# Altium PCB MCU.PcbDoc (part 1 of 2)
Units mil, origin at the board's own origin, x right, y up, seen from the top; angles counter-clockwise.
Board outline 3149.61 x 1968.5 mil, 4 copper layers (L1(Signal), L2(PWR), L3(GND), L4(Signal)), stack 59.53 mil thick; 84 components, 75 nets, 297 pads, 175 vias.
Unrouted connection lines stored in the file: 10.
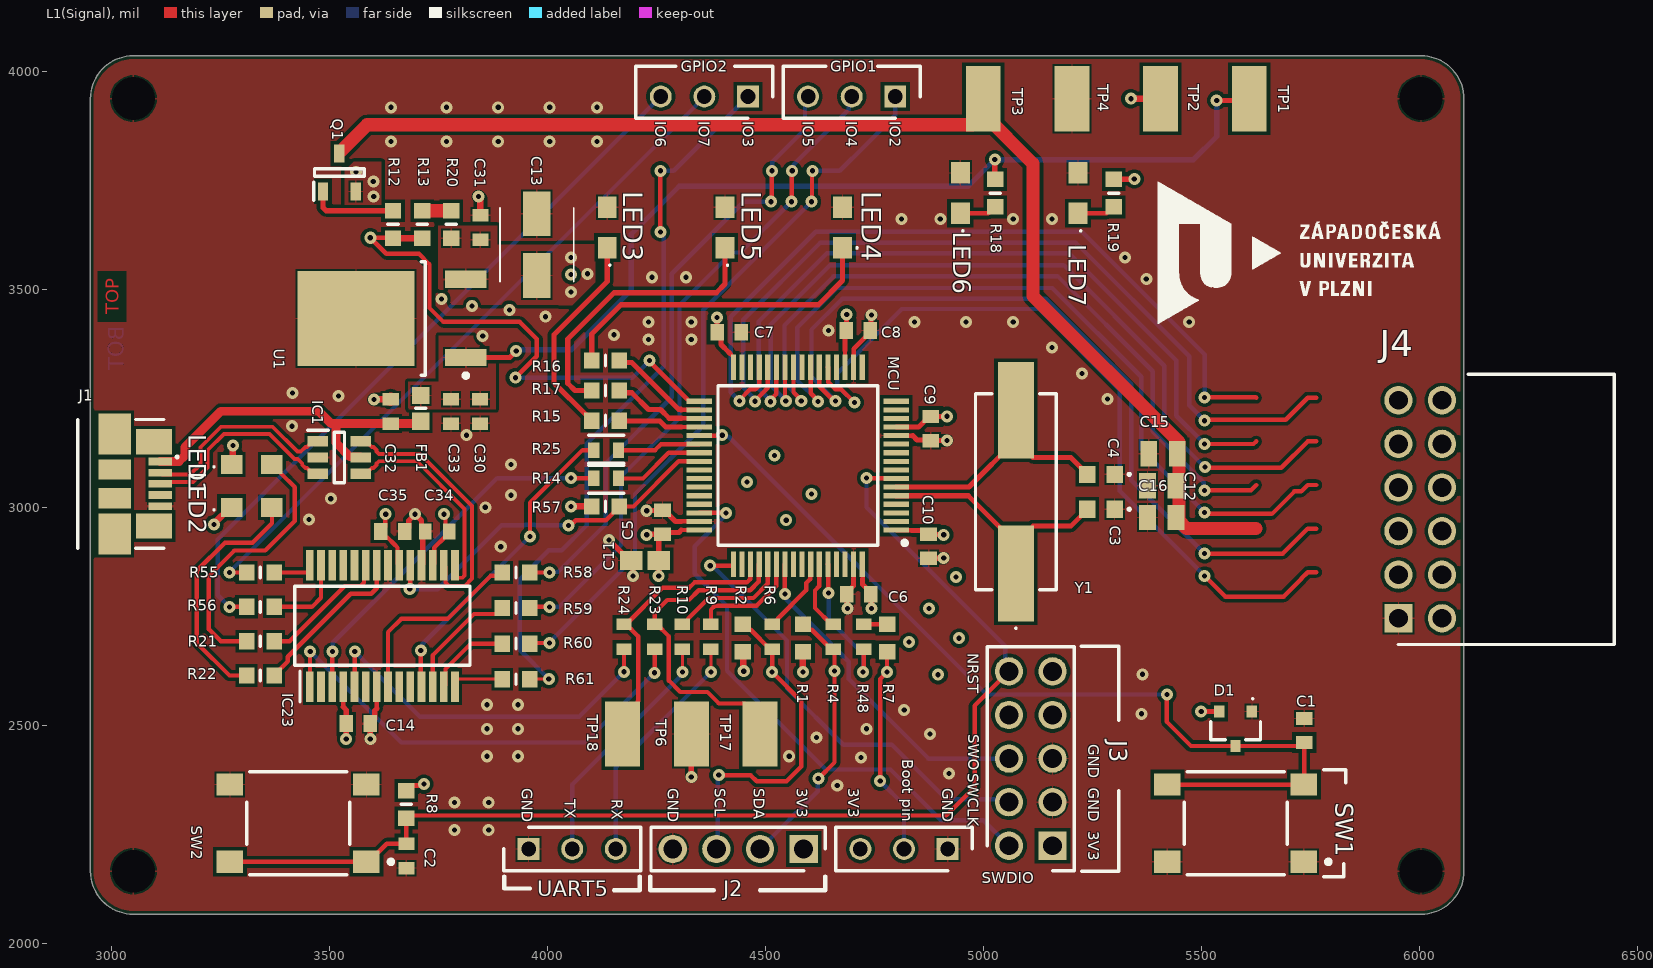
[diagram p0: L1(Signal) view]
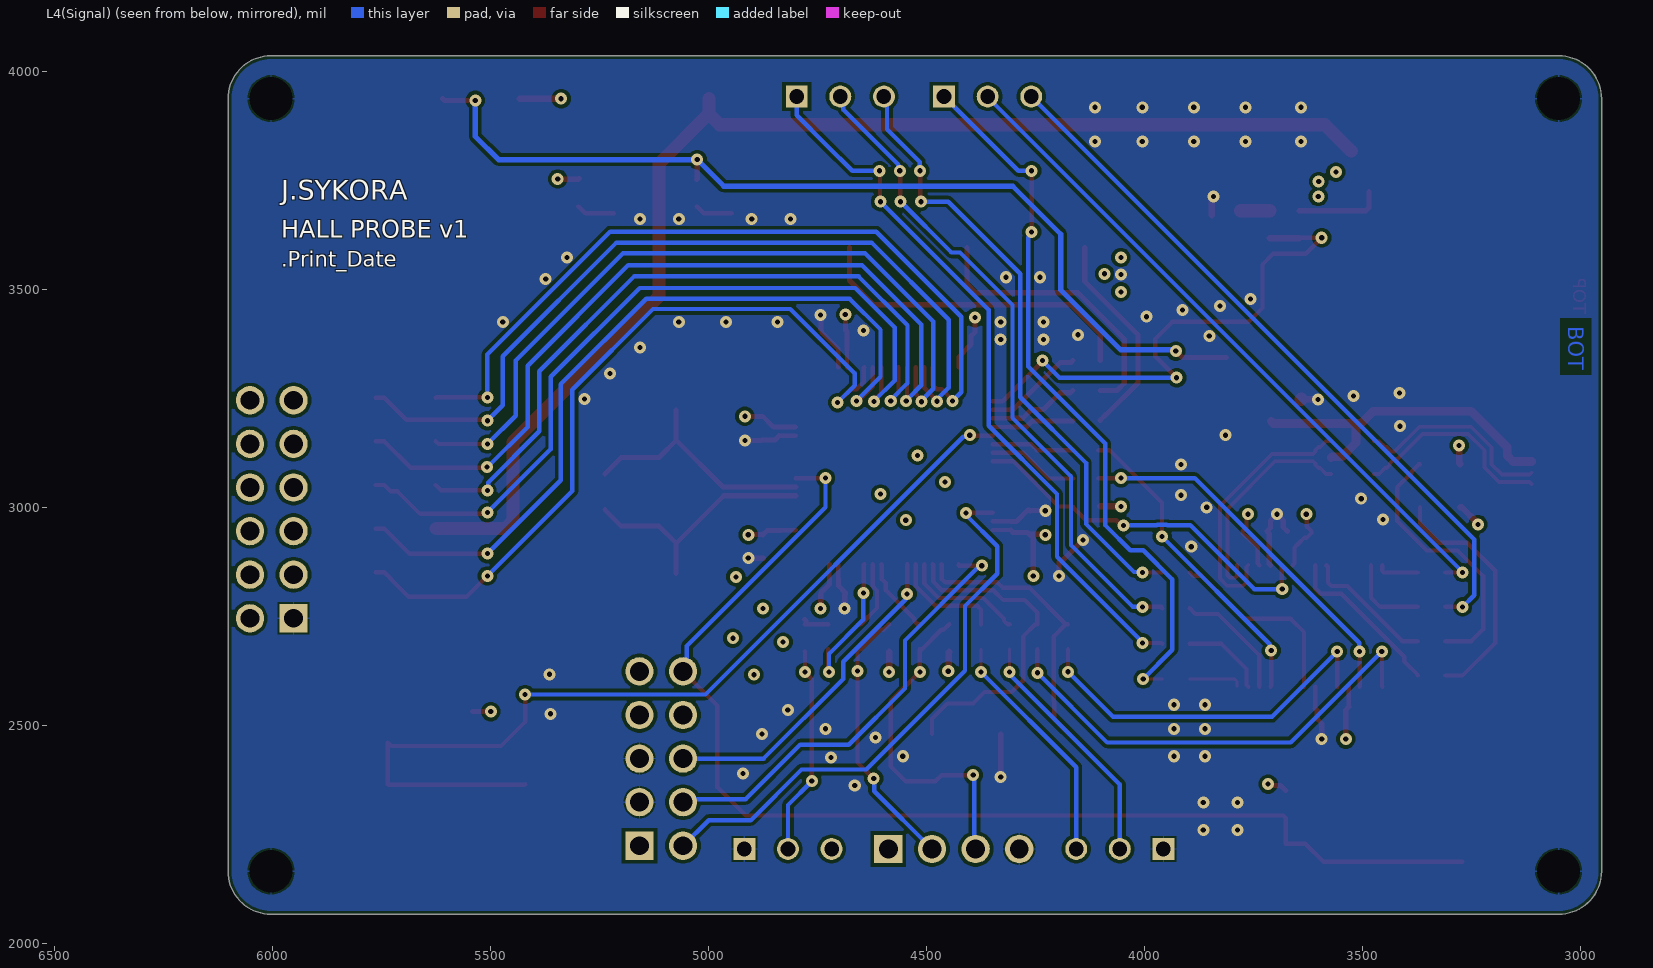
[diagram p1: L4(Signal) view, seen from below]
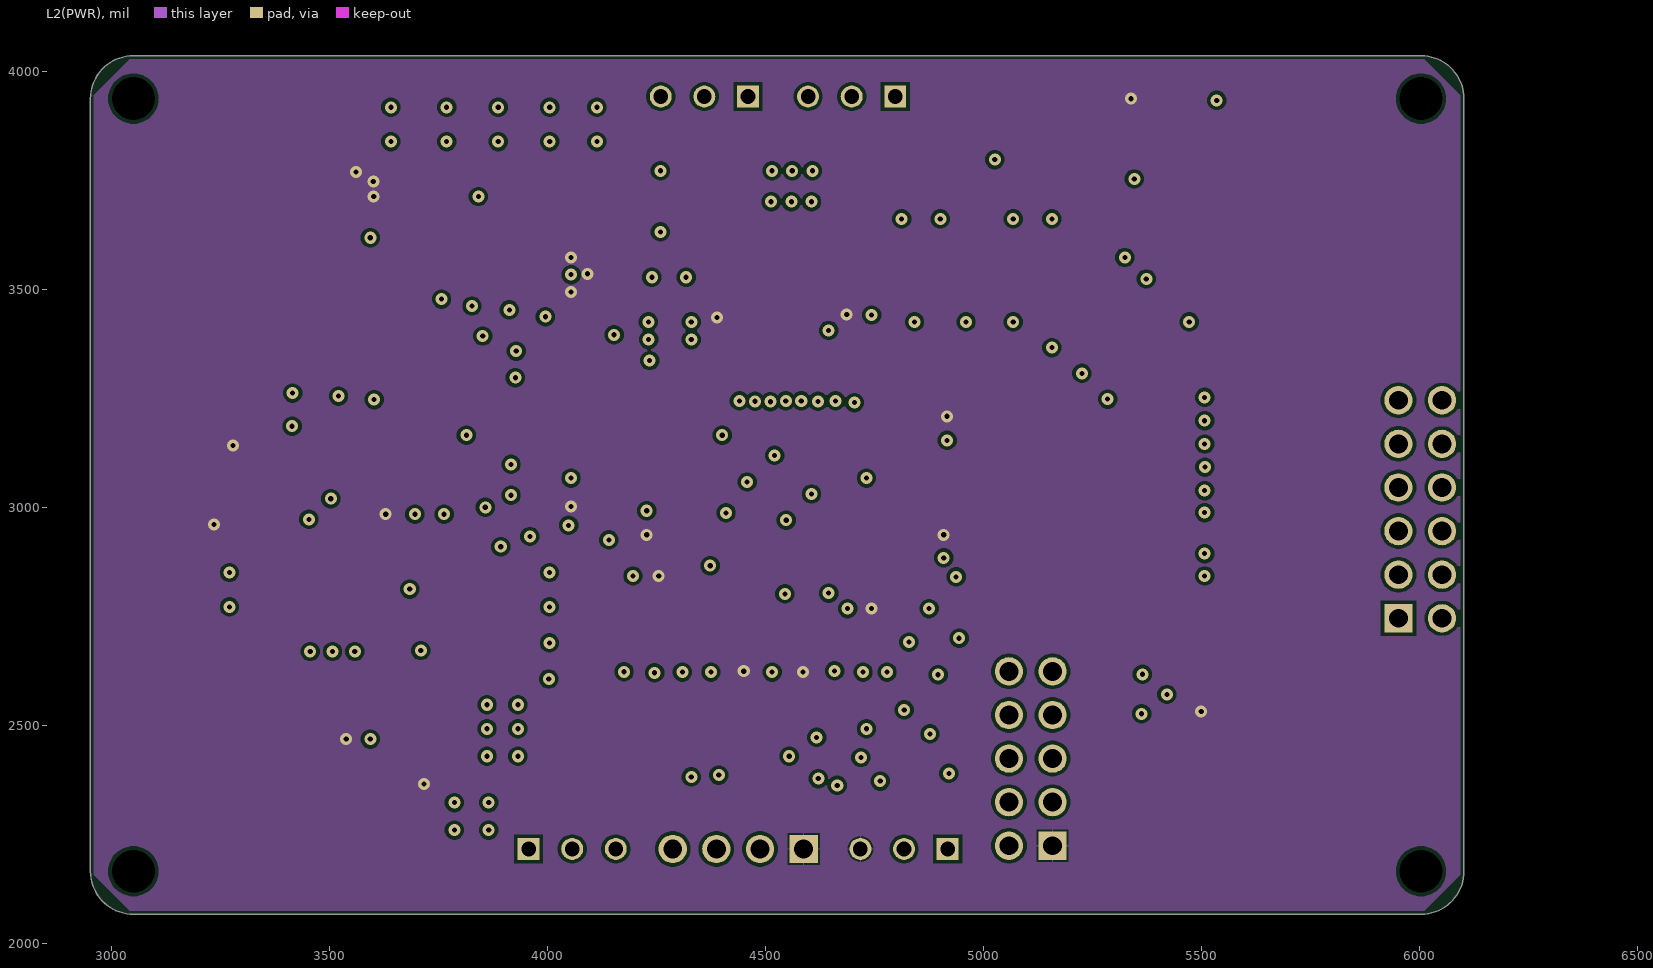
[diagram p2: L2(PWR)]
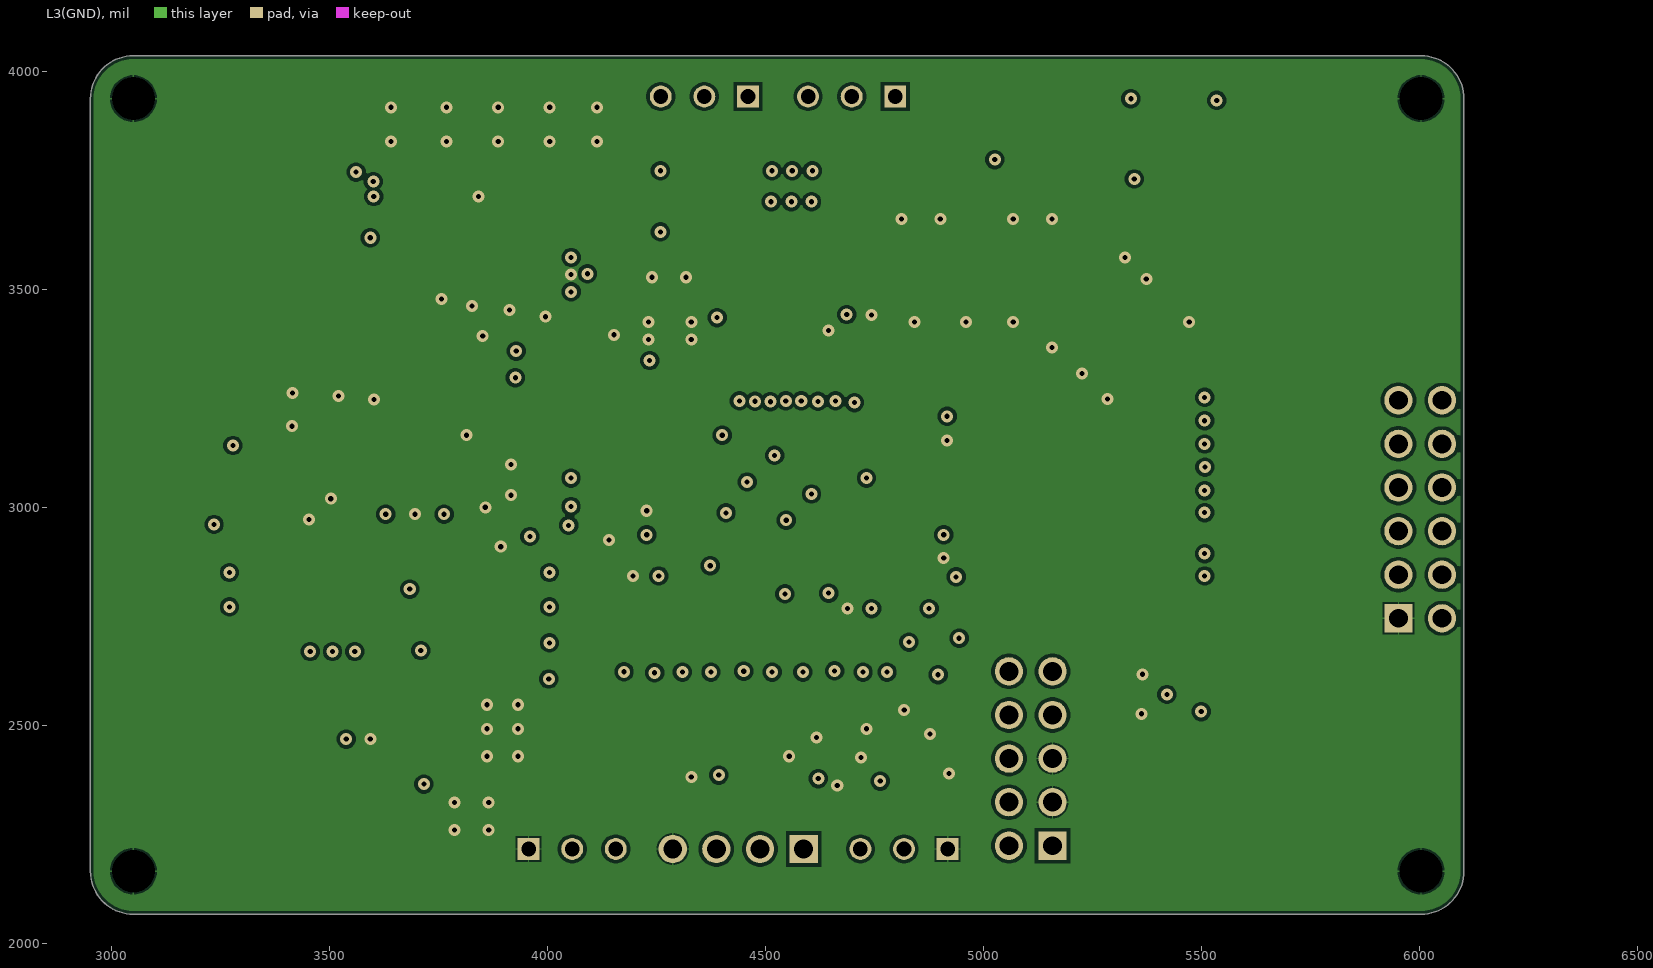
[diagram p3: L3(GND)]
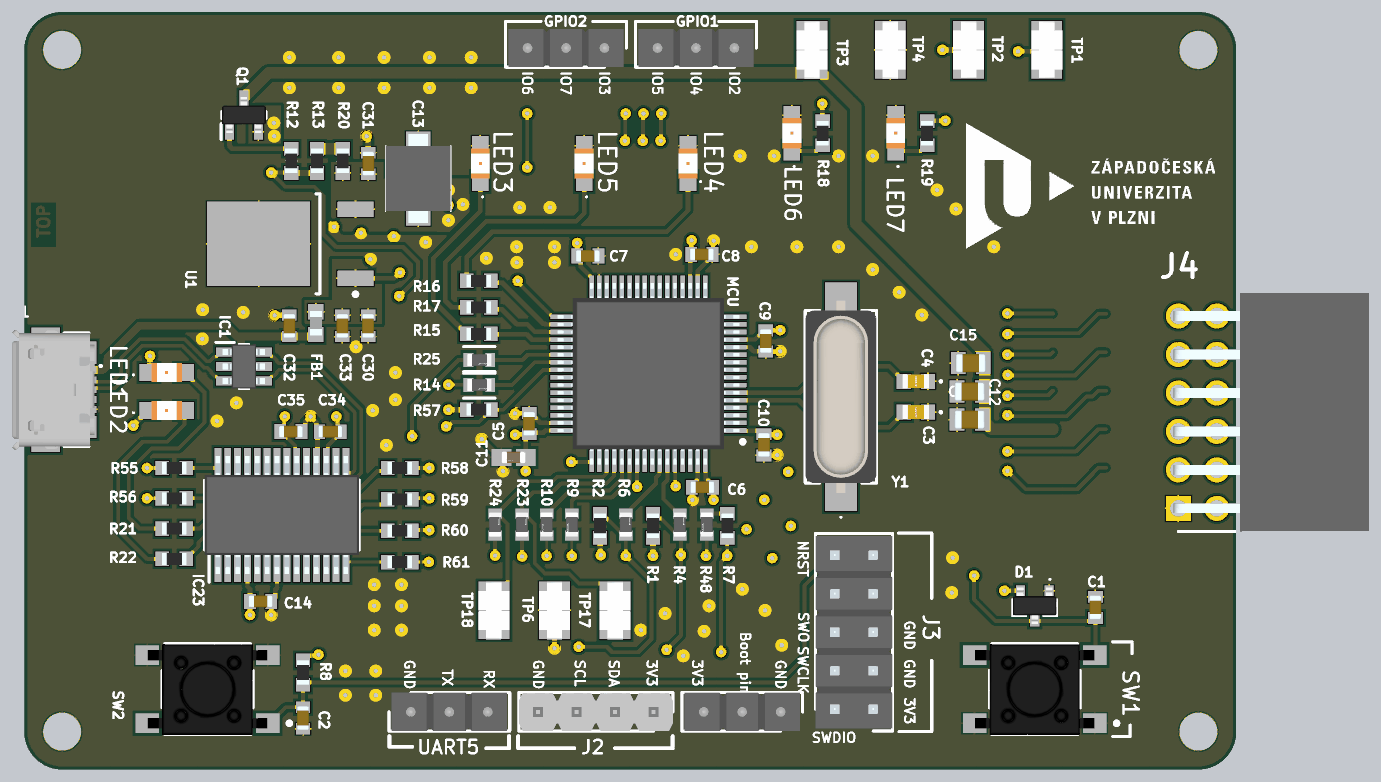
[diagram p4: 3D render of the assembled board from above, using the file's embedded part models]

## Layer stack, top to bottom
Top Solder: solder mask 0.984, Solder Resist, Dk 3.7
L1(Signal): signal copper 0.709
Dielectric 1: prepreg 2.717, 2313, Dk 4.3
Dielectric 3: prepreg 2.717, PP-006, Dk 4.3
L2(PWR): signal copper 1.378
Core: core 44.488, FR-4, Dk 4.6
L3(GND): signal copper 1.378
Dielectric 2: prepreg 2.717, 2313, Dk 4.3
Dielectric 4: prepreg 2.717, PP-006, Dk 4.3
L4(Signal): signal copper 0.709
Bottom Solder: solder mask 0.984, Solder Resist, Dk 3.7

## Board outline
2952.76,2165.35 2952.76,3937.01 cw(c3051.18,3937.01) 3051.18,4035.43 6003.94,4035.43 cw(c6003.94,3937.01) 6102.36,3937.01 6102.36,2165.35 cw(c6003.94,2165.35) 6003.94,2066.93 3051.18,2066.93 cw(c3051.18,2165.35)

## Design rules (kind name [scope] priority, off if disabled: settings)
BoardOutlineClearance [All] p1: gap=7.87 ignorepadtopadclearanceinfootprint=FALSE
Clearance [All] p1: gap=7.87 ignorepadtopadclearanceinfootprint=FALSE
ComponentClearance [All] p1: gap=4 collisioncheckmode=3 verticalgap=4 showdistances=TRUE
DiffPairsRouting [All] p1: maxlimit=8 minlimit=4 mostfreqgap=5 toplayer_mingap=8 toplayer_prefgap=8 toplayer_minwidth=8.96 toplayer_maxwidth=8.96 toplayer_prefwidth=8.96 bottomlayer_mingap=5 bottomlayer_maxgap=5 bottomlayer_minwidth=7.3 bottomlayer_maxwidth=7.3 bottomlayer_prefwidth=7.3 impedanceprofiledriven=TRUE impedanceprofileid={8D1EFE06-021B-4C95-90AD-C5009AD51BC2} impedanceprofilevalue=90.000000 maxuncoupledlength=500
Height [All] p1: minheight=0 maxheight=71497.94 prefheight=500
HoleSize [All] p1: absolutevalues=TRUE maxlimit=248.03 minlimit=7.87 maxpercent=80.000 minpercent=20.000
HoleToHoleClearance [All] p1: gap=9.84 allowstackedmicrovias=FALSE
MinimumAnnularRing [All] p1: minimumring=3
MinimumSolderMaskSliver [All] p1: minsoldermaskwidth=0
PlaneClearance [All] p1: clearance=4
PlaneConnect PlaneConnectPowerPads [InPadClass('PowerPads')] p1: planeconnectstyle=Direct reliefexpansion=20 reliefentries=4 reliefconductorwidth=10 reliefairgap=10
PlaneConnect [All] p2: pad.planeconnectstyle=Relief pad.reliefexpansion=11.81 pad.reliefentries=4 pad.reliefconductorwidth=4 pad.reliefairgap=4 via.planeconnectstyle=Direct via.reliefexpansion=11.81 via.reliefentries=4 via.reliefconductorwidth=5 via.reliefairgap=5
PolygonConnect PolygonConnectPowerPads [All vs (InPadClass('PowerPads'))] p1: connectstyle=Direct reliefconductorwidth=10 reliefentries=4 polygonreliefangle="90 Angle" airgapwidth=10
PolygonConnect [All] p2: thpad.connectstyle=Relief thpad.reliefconductorwidth=4 thpad.reliefentries=4 thpad.polygonreliefangle="90 Angle" thpad.airgapwidth=4 smdpad.connectstyle=Relief smdpad.reliefconductorwidth=4 smdpad.reliefentries=4 smdpad.polygonreliefangle="90 Angle" smdpad.airgapwidth=4 via.connectstyle=Direct via.reliefconductorwidth=5 via.reliefentries=4 via.polygonreliefangle="90 Angle" via.airgapwidth=5
RoutingVias [All] p1: holewidth=11.81 width=27.56 viastyle="Through Hole" minholewidth=7.87 minwidth=17.72 maxholewidth=248.03 maxwidth=257.87
SilkToSilkClearance [All] p1: silktosilkclearance=0
SilkToSolderMaskClearance [IsPad] p1: minsilkscreentomaskgap=4 clearancetoexposedcopper=TRUE
SolderMaskExpansion [All] p1: expansion=2.95 istentingtop=FALSE
Width [All] p1: maxlimit=71497.94 minlimit=4 preferedwidth=10
20 further rules are at their usual default settings.

## Classes and differential pairs
differential pair class DIFF_USB: CONN_USB_D
component class MCU: "Boot pin" C1 C2 C3 C4 C5 C6 C7 C8 C9 C10 C11 C12 C13 C14 C15 C16 C30 C31 C32 C33 C34 C35 D1 FB1 GPIO1 GPIO2 IC1 IC23 J1 J2 J3 LED1 LED2 MCU Q1 R1 R2 R4 R6 R7 R8 R9 R10 R12 R13 R14 R20 R21 R22 R23 R24 R25 R48 R55 R56 R57 R58 R59 R60 R61 SW1 SW2 TP1 TP2 TP3 TP4 TP6 TP17 TP18 U1 UART5 Y1
component class U_LED_STATUS: 3.3v LED3 LED4 LED5 LED6 LED7 R15 R16 R17 R18 R19
differential pair CONN_USB_D: +CONN_USB_D_P -CONN_USB_D_N
differential pair USB_D: +USB_D_P -USB_D_N

## Components (designator, comment, footprint, x,y, rotation, side; value= is the part's Value field where it differs from the comment)
"Boot pin" "M20-9990345" HDRV3W64P0X254_1X3_762X254X864P 4918.5,2216.54 r180 top
C1 "100n" CAPC1608X95N 5736.22,2488.19 r270 top
C2 "100n" CAPC1608X90N 3677.17,2200.79 r90 top
C3 "18pF" C0603 5269.9,2995.57 r180 top
C4 "18pF" C0603 5269.9,3075.57 r180 top
C5 "100n" CAPC1608X95N 4264.9,2965.57 r270 top
C6 "100n" CAPC1608X95N 4714.9,2800.57 r0 top
C7 "100n" CAPC1608X95N 4417.32,3401.57 r180 top
C8 "100n" CAPC1608X95N 4713.52,3405.57 r180 top
C9 "100n" CAPC1608X95N 4879.9,3180.57 r90 top
C10 "100n" CAPC1608X95N 4874.9,2910.57 r90 top
C11 "10u" FP-GRM188-0_2-IPC_A 4224.41,2877.95 r180 top
C12 "47uF 10VDC 0805" CAPC2012X145N 5409.45,3049.21 r0 top
C13 "865080640004" 865080640004 3976.38,3602.36 r270 top
C14 "4.7uF" CAPC1608X95N 3566.93,2503.94 r180 top
C15 "47uF 10VDC 0805" CAPC2012X145N 5412.4,3123.03 r0 top
C16 "47uF 10VDC 0805" CAPC2012X145N 5409.45,2976.38 r0 top
C30 "1uF" CAPC1608X90N 3846.46,3219.88 r90 top
C31 "2.2uF" CAPC1608X90N 3846.93,3641.73 r270 top
C32 "2u2" CAPC1608X90N 3641.54,3219.88 r270 top
C33 "2u2" CAPC1608X90N 3779.33,3219.88 r90 top
C34 "1uF" CAPC1608X90N 3748.03,2944.88 r180 top
C35 "100n" CAPC1608X95N 3645.67,2944.88 r180 top
D1 "BAV99,215" BAV99215 5578.74,2492.13 r180 top
FB1 "FERRITE BEAD" BEADC1608X75N 3710.43,3226.77 r270 top
GPIO1 "GPIO_2_4_5 CONNECTOR" HDRV3W64P0X254_1X3_762X254X864P 4798.43,3941.93 r180 top
GPIO2 "GPIO 3_6_7 CONNECTOR" HDRV3W64P0X254_1X3_762X254X864P 4460.63,3941.93 r180 top
IC1 "ESD PROTECTION" SOT95P280X145-6N 3523.62,3114.17 r0 top
IC23 "UART to USB" SOP65P780X200-28N 3622.34,2728.08 r90 top
J1 "USB CONNECTOR" 47346-0001 2923.75,3053.71 r90 top
J2 "I2C PIN HEADER" HDRV4W90P0X254_1X4_994X249X560P 4588.19,2216.54 r180 top
J3 "SWD" HDRV10W64P254_2X5_1270X508X834P 5159.06,2223.82 r90 top
J4 "SSQ-106-02-T-D-RA" RHDRRA12W64P254_2X6_1575X851X495P 5952.17,2745.47 r270 top
LED1 "RED_RX" APT2012SECKJ3PRV 3322.83,3098.43 r0 top
LED2 "RED_TX" APT2012SECKJ3PRV 3322.83,3000 r0 top
LED3 "RED" APT2012SECKJ3PRV 4137.8,3641.73 r90 top
LED4 "RED" APT2012SECKJ3PRV 4677.66,3641.73 r90 top
LED5 "RED" APT2012SECKJ3PRV 4407.73,3641.73 r90 top
LED6 "RED" APT2012SECKJ3PRV 4947.59,3720.47 r90 top
LED7 "RED" APT2012SECKJ3PRV 5217.52,3720.47 r90 top
MCU "STM32F103RET6" QFP50P1200X1200X160-64N 4574.9,3095.57 r180 top
Q1 "PMV48XPA2R" SOT95P230X110-3N 3523.62,3767.72 r90 top
R1 "2k2" RESC1608X55N 4586.61,2700.25 r90 top
R2 "2k2" RESC1608X55N 4448.82,2700.25 r90 top
R4 "0R" FP-ERJ-3GEY0R00V-MFG 4656.32,2703.2 r270 top value=0Ω
R6 "0R" FP-ERJ-3GEY0R00V-MFG 4516.02,2703.2 r270 top value=0Ω
R7 "10k" RESC1608X55N 4779.89,2700.25 r270 top
R8 "10k" RESC1608X55N 3677.17,2318.9 r90 top
R9 "0R" FP-ERJ-3GEY0R00V-MFG 4375.72,2703.2 r90 top value=0Ω
R10 "0R" FP-ERJ-3GEY0R00V-MFG 4310.29,2703.2 r90 top value=0Ω
R12 "0R" RESC1608X55N 3646.65,3648.62 r90 top
R13 "0R" RESC1608X55N 3713.48,3648.62 r90 top
R14 "0R" FP-ERJ-3GEY0R00V-MFG 4135.37,3066.2 r180 top value=0Ω
R15 "1k2" RESC1608X55N 4133.86,3198.82 r0 top
R16 "1k2" RESC1608X55N 4133.86,3336.61 r0 top
R17 "1k2" RESC1608X55N 4133.86,3267.72 r0 top
R18 "1k2" RESC1608X55N 5027.56,3720.47 r90 top
R19 "1k2" RESC1608X55N 5299.21,3720.47 r90 top
R20 "10k" RESC1608X55N 3780.3,3648.62 r270 top
R21 "1k2" RESC1608X55N 3342.52,2692.91 r0 top
R22 "1k2" RESC1608X55N 3342.52,2614.17 r0 top
R23 "0R" FP-ERJ-3GEY0R00V-MFG 4246.51,2703.2 r270 top value=0Ω
R24 "0R" FP-ERJ-3GEY0R00V-MFG 4176.36,2703.2 r270 top value=0Ω
R25 "0R" FP-ERJ-3GEY0R00V-MFG 4135.37,3131.2 r180 top value=0Ω
R48 "0R" FP-ERJ-3GEY0R00V-MFG 4726.48,2703.2 r90 top value=0Ω
R55 "0R" RESC1608X55N 3342.52,2850.39 r0 top
R56 "0R" RESC1608X55N 3342.52,2771.65 r0 top
R57 "10K" RESC1608X55N 4133.86,3001.97 r180 top
R58 "0R" RESC1608X55N 3928.61,2850.39 r180 top
R59 "0R" RESC1608X55N 3928.61,2768.92 r180 top
R60 "0R" RESC1608X55N 3928.61,2687.44 r180 top
R61 "0R" RESC1608X55N 3928.61,2605.97 r180 top
SW1 "BUTTON" FP-PTS645SM43SMTR92LFS-MFG 5578.74,2275.59 r180 top
SW2 "#RESET" FP-PTS645SM43SMTR92LFS-MFG 3429.13,2275.59 r180 top
TP1 "5019" KSTN-5019_V 5610.24,3937.01 r270 top
TP2 "5019" KSTN-5019_V 5406.82,3937.01 r270 top
TP3 "5019" KSTN-5019_V 5000,3937.01 r90 top
TP4 "5019" KSTN-5019_V 5203.41,3937.01 r90 top
TP6 "5019" KSTN-5019_V 4330.71,2480.32 r90 top
TP17 "5019" KSTN-5019_V 4488.19,2480.32 r90 top
TP18 "5019" KSTN-5019_V 4173.23,2480.31 r90 top
U1 "LD39150DT33-R" TO-252_M 3644.25,3433.15 r180 top
UART5 "UART5 CONNECTOR" HDRV3W64P0X254_1X3_762X254X864P 3957.48,2216.54 r0 top
Y1 "16MHz" ABLS 5074.9,3035.57 r90 top

## Footprints (in the part's own frame and the unit in brackets; to place one, negate y for a bottom-side part, rotate by r counter-clockwise, add the part's x,y. Pads: shape width x height; smd on the part's side, far side on the other; paste and mask are expansions set on the pad)
47346-0001 [mm]
  rect 0.45x1.38 smd: 1(1.3,-4.81) 2(0.65,-4.81) 3(0,-4.81) 4(-0.65,-4.81) 5(-1.3,-4.81)
  rect 1.475x2.1 smd: 6(-2.452,-4.45) 7(2.452,-4.45)
  rect 1.175x1.9 smd: 8(0.837,-2.15) 9(-0.837,-2.15)
  rect 2.375x1.9 smd: 10(2.913,-2.15) 11(-2.913,-2.15)
  silkscreen extent -3.75,-5.84 3.75,0, body extent -3.99,-5.38 3.99,0.05, height 2.7
865080640004 [mm]
  rect 2.6x1.6 smd: 1(1.8,0) 2(-1.8,0)
  silkscreen extent -2.15,-2.15 2.15,2.15, body extent -2.94,-2.15 2.94,2.15, height 5.6
ABLS [mm]
  rect 5.6x2.1 smd: 1(-4.75,0) 2(4.75,0)
  silkscreen extent -8,-2.35 5.7,2.35, body extent -6.35,-2.35 6.35,2.35, height 4.2
APT2012SECKJ3PRV [mm]
  rect 1.25x1.1 smd: 1(-1.175,0) 2(1.175,0)
  silkscreen extent -2.25,-0.2 -2.15,-0.1, body extent -1,-0.63 1,0.63, height 0.85
BAV99215 [mm]
  rect 0.6x0.7 smd: 1(-0.95,-1) 2(0.95,-1) 3(0,1)
  silkscreen extent -1.45,-1.8 1.45,0.65, body extent -1.45,-1.2 1.45,1.2, height 0.95
BEADC1608X75N [mm]
  rect 1x1 smd: 1(-0.75,0) 2(0.75,0)
  silkscreen extent 0,-0.3 0,0.3, body extent -0.8,-0.4 0.8,0.4, height 0.75
C0603 [mm]
  rect 0.95x1 smd: 1(-0.8,0) 2(0.8,0)
  silkscreen extent -1.7,-0.05 -1.6,0.05, body extent -0.87,-0.48 0.88,0.47, height 0.87
CAPC1608X90N [mm]
  rect 0.73x0.94 smd: 1(-0.71,0) 2(0.71,0)
  body extent -0.8,-0.4 0.8,0.4, height 0.9
CAPC1608X95N [mm]
  rect 0.78x0.98 smd: 1(-0.7,0) 2(0.7,0)
  body extent -0.8,-0.4 0.8,0.4, height 0.95
CAPC2012X145N [mm]
  rect 0.97x1.47 smd: 1(-0.83,0) 2(0.83,0)
  body extent -1,-0.63 1,0.63, height 1.45
FP-ERJ-3GEY0R00V-MFG [mm]
  rect 0.65x0.9 smd paste+0 mask+0: 1(-0.725,0) 2(0.725,0)
  body extent -1.15,-0.58 1.15,0.58, height 0.25
FP-GRM188-0_2-IPC_A [mil]
  rect 51.38x43.55 smd paste+0 mask+0: 1(-31.52,0) 2(31.52,0)
  body extent -77,-41 77,41, height 10
FP-PTS645SM43SMTR92LFS-MFG [mm]
  rect 1.55x1.3 smd paste+0 mask+0: 1(-3.975,2.25) 2(3.975,2.25) 3(-3.975,-2.25) 4(3.975,-2.25)
  silkscreen extent -5.53,-3 3,3, body extent -4.85,-3.1 4.85,3.1, height 0.25
HDRV3W64P0X254_1X3_762X254X864P [mm]
  rect 1.275x1.275 hole 0.85: 1(0,0)
  round 1.275 hole 0.85: 2(2.54,0) 3(5.08,0)
  silkscreen extent -1.45,-1.27 6.53,1.27, body extent -1.27,-1.27 6.35,1.27, height 8.64
HDRV4W90P0X254_1X4_994X249X560P [mm]
  rect 1.65x1.65 hole 1.1: 1(0,0)
  round 1.65 hole 1.1: 2(2.54,0) 3(5.08,0) 4(7.62,0)
  silkscreen extent -1.27,-1.27 8.89,1.27, body extent -1.27,-1.25 8.89,1.25, height 5.3
HDRV10W64P254_2X5_1270X508X834P [mm]
  rect 1.65x1.65 hole 1.1: 1(0,0)
  round 1.65 hole 1.1: 2(0,2.54) 3(2.54,0) 4(2.54,2.54) 5(5.08,0) 6(5.08,2.54) 7(7.62,0) 8(7.62,2.54) 9(10.16,0) 10(10.16,2.54)
  silkscreen extent -1.45,-1.27 11.61,3.81, body extent -1.27,-1.27 11.43,3.81, height 8.34
KSTN-5019_V [mm] "Test Point, 1-Leads, Body 3.81x2.03mm"
  rect 3.8x2.03 smd: 1(0,0)
  body extent -1.91,-1.02 1.9,1.02, height 2.29
QFP50P1200X1200X160-64N [mm]
  rect 1.475x0.3 smd: 1(-5.738,3.75) 2(-5.738,3.25) 3(-5.738,2.75) 4(-5.738,2.25) 5(-5.738,1.75) 6(-5.738,1.25) 7(-5.738,0.75) 8(-5.738,0.25) 9(-5.738,-0.25) 10(-5.738,-0.75) 11(-5.738,-1.25) 12(-5.738,-1.75) 13(-5.738,-2.25) 14(-5.738,-2.75) 15(-5.738,-3.25) 16(-5.738,-3.75) 33(5.738,-3.75) 34(5.738,-3.25) 35(5.738,-2.75) 36(5.738,-2.25) 37(5.738,-1.75) 38(5.738,-1.25) 39(5.738,-0.75) 40(5.738,-0.25) 41(5.738,0.25) 42(5.738,0.75) 43(5.738,1.25) 44(5.738,1.75) 45(5.738,2.25) 46(5.738,2.75) 47(5.738,3.25) 48(5.738,3.75)
  rect 0.3x1.475 smd: 17(-3.75,-5.738) 18(-3.25,-5.738) 19(-2.75,-5.738) 20(-2.25,-5.738) 21(-1.75,-5.738) 22(-1.25,-5.738) 23(-0.75,-5.738) 24(-0.25,-5.738) 25(0.25,-5.738) 26(0.75,-5.738) 27(1.25,-5.738) 28(1.75,-5.738) 29(2.25,-5.738) 30(2.75,-5.738) 31(3.25,-5.738) 32(3.75,-5.738) 49(3.75,5.738) 50(3.25,5.738) 51(2.75,5.738) 52(2.25,5.738) 53(1.75,5.738) 54(1.25,5.738) 55(0.75,5.738) 56(0.25,5.738) 57(-0.25,5.738) 58(-0.75,5.738) 59(-1.25,5.738) 60(-1.75,5.738) 61(-2.25,5.738) 62(-2.75,5.738) 63(-3.25,5.738) 64(-3.75,5.738)
  silkscreen extent -6.35,-4.65 4.65,4.65, body extent -6,-6 6,6, height 1.6
RESC1608X55N [mm]
  rect 0.9x0.95 smd: 1(-0.8,0) 2(0.8,0)
  body extent -0.8,-0.4 0.8,0.4, height 0.55
RHDRRA12W64P254_2X6_1575X851X495P [mm]
  rect 1.65x1.65 hole 1.1: 1(0,0)
  round 1.65 hole 1.1: 2(0,2.54) 3(-2.54,0) 4(-2.54,2.54) 5(-5.08,0) 6(-5.08,2.54) 7(-7.62,0) 8(-7.62,2.54) 9(-10.16,0) 10(-10.16,2.54) 11(-12.7,0) 12(-12.7,2.54)
  silkscreen extent -14.23,0 1.53,12.57, body extent -14.23,-0.32 1.53,12.57, height 4.95
SOP65P780X200-28N [mm]
  rect 1.775x0.45 smd: 1(-3.538,4.225) 2(-3.538,3.575) 3(-3.538,2.925) 4(-3.538,2.275) 5(-3.538,1.625) 6(-3.538,0.975) 7(-3.538,0.325) 8(-3.538,-0.325) 9(-3.538,-0.975) 10(-3.538,-1.625) 11(-3.538,-2.275) 12(-3.538,-2.925) 13(-3.538,-3.575) 14(-3.538,-4.225) 15(3.538,-4.225) 16(3.538,-3.575) 17(3.538,-2.925) 18(3.538,-2.275) 19(3.538,-1.625) 20(3.538,-0.975) 21(3.538,-0.325) 22(3.538,0.325) 23(3.538,0.975) 24(3.538,1.625) 25(3.538,2.275) 26(3.538,2.925) 27(3.538,3.575) 28(3.538,4.225)
  silkscreen extent -4.43,-5.1 2.3,5.1, body extent -3.9,-5.1 3.9,5.1, height 2
SOT95P230X110-3N [mm]
  rect 1.05x0.6 smd: 1(-1.1,0.95) 2(-1.1,-0.95) 3(1.1,0)
  silkscreen extent -1.63,-1.45 0.23,1.5, body extent -1.2,-1.45 1.2,1.45, height 0.95
SOT95P280X145-6N [mm]
  rect 1.2x0.6 smd: 1(-1.25,0.95) 2(-1.25,0) 3(-1.25,-0.95) 4(1.25,-0.95) 5(1.25,0) 6(1.25,0.95)
  silkscreen extent -1.85,-1.46 0.3,1.6, body extent -1.4,-1.46 1.4,1.46, height 1.45
TO-252_M [mm] "D-PAK, 4-Leads, Body 6.1x6.5mm, Pitch 2.28mm, Lead Span 9.7mm, IPC Low Density"
  rect 2.4x1 smd: 1(-4.3,2.28) 3(-4.3,-2.28)
  rect 6.8x5.55 smd: 4(2.1,0)
  silkscreen extent -4.43,-3.3 -1.7,3.45, body extent -1.95,-3.3 4.25,3.3, height 2.4

## Part data
"Boot pin": "Connector", Manufacturer_Name=Harwin, Mouser Part Number=855-M20-9990345, Datasheet Link=https://cdn.harwin.com/pdfs/M20-999.pdf, Height=8.64mm, Manufacturer_Part_Number=M20-9990345, Mouser Price/Stock=https://www.mouser.co.uk/ProductDetail/Harwin/M20-9990345?qs=ulE8k0yEMYbl6ZPCtNdmpA%3D%3D
C1 C5 C6 C7 C8 C9 C10 C14 C35: library part C0603C104J4RAC, "Capacitor", Manufacturer_Name=KEMET, Mouser Part Number=80-C0603C104J4RAC, Arrow Part Number=C0603C104J4RAC, Arrow Price/Stock=https://www.arrow.com/en/products/c0603c104j4rac/kemet-corporation?region=nac, Datasheet Link=https://datasheet.datasheetarchive.com/originals/distributors/SFDatasheet-4/sf-00083930.pdf, Height=0.95mm, Manufacturer_Part_Number=C0603C104J4RAC, Mouser Price/Stock=https://www.mouser.co.uk/ProductDetail/KEMET/C0603C104J4RAC?qs=sykUljcfnH31MXmq5HGjkg%3D%3D
C2 C30 C31 C32 C33 C34: library part CL10A105KA8NFNC, "Capacitor", Manufacturer_Name=SAMSUNG, Mouser Part Number=187-CL10A105KA8NFNC, Arrow Part Number=CL10A105KA8NFNC, Arrow Price/Stock=https://www.arrow.com/en/products/cl10a105ka8nfnc/samsung-electro-mechanics?region=nac, Datasheet Link=https://www.mouser.co.za/datasheet/2/585/MLCC-1837944.pdf, Height=0.9mm, Manufacturer_Part_Number=CL10A105KA8NFNC, Mouser Price/Stock=https://www.mouser.co.uk/ProductDetail/Samsung-Electro-Mechanics/CL10A105KA8NFNC?qs=%252B6g0mu59x7ItvV%2F7DV9Lig%3D%3D
C3 C4: library part C0603C180K4HACTU, "Capacitor", Manufacturer_Name=KEMET, Mouser Part Number=80-C0603C180K4HACTU, Datasheet Link=https://content.kemet.com/datasheets/KEM_C1007_X8R_ULTRA_150C_SMD.pdf, Height=0.87mm, Manufacturer_Part_Number=C0603C180K4HACTU, Mouser Price/Stock=https://www.mouser.com/Search/Refine.aspx?Keyword=80-C0603C180K4HACTU
C11: library part CMP-2006-02814-2, "Chip Multilayer Ceramic Capacitors for General Purpose, 0603, 10uF, X5R, 15%, 20%, 16V", Capacitance=10uF, Case Code (Imperial)=0603, Case Code (Metric)=1608, Dielectric=X5R, Max Operating Temperature=85°C, Min Operating Temperature=-55°C, Package Quantity=4000, Tolerance=20%, Voltage=16V, Case/Package=0603, Depth=0.8mm, Height=0.8mm, Lead Free="Lead Free", Length=1.6mm, Mount="Surface Mount", Packaging="Tape and Reel", REACH SVHC="No SVHC", Thickness=0.031inch, Voltage Rating=16V, Voltage Rating (DC)=16V, Width=0.031inch
C12 C15 C16: library part GRM21BR61A476ME15K, "Capacitor", Manufacturer_Name="Murata Electronics", Mouser Part Number=81-GRM21BR61A476ME5K, Arrow Part Number=GRM21BR61A476ME15K, Arrow Price/Stock=https://www.arrow.com/en/products/grm21br61a476me15k/murata-manufacturing?region=nac, Datasheet Link=http://www.murata.com/~/media/webrenewal/support/library/catalog/products/capacitor/mlcc/c02e.pdf, Height=1.45mm, Manufacturer_Part_Number=GRM21BR61A476ME15K, Mouser Price/Stock=https://www.mouser.co.uk/ProductDetail/Murata-Electronics/GRM21BR61A476ME15K?qs=hNud%2FORuBR153XPtoO6XtA%3D%3D
C13: "Capacitor Polarised", Manufacturer_Name="Wurth Elektronik", Mouser Part Number=710-865080640004, Datasheet Link=https://www.we-online.de/katalog/datasheet/865080640004.pdf, Height=5.5mm, Manufacturer_Part_Number=865080640004, Mouser Price/Stock=https://www.mouser.co.uk/ProductDetail/Wurth-Elektronik/865080640004?qs=0KOYDY2FL2%2FjY4kqBxIvAg%3D%3D
D1: "Diode", Manufacturer_Name=Nexperia, Mouser Part Number=771-BAV99-T/R, Arrow Part Number=BAV99,215, Arrow Price/Stock=https://www.arrow.com/en/products/bav99215/nexperia?region=nac, Datasheet Link=https://assets.nexperia.com/documents/data-sheet/BAV99_SER.pdf, Height=1.1mm, Manufacturer_Part_Number=BAV99,215, Mouser Price/Stock=https://www.mouser.co.uk/ProductDetail/Nexperia/BAV99215?qs=me8TqzrmIYWbN0bCKV3n5w%3D%3D
FB1: library part BLM18KN101EH1D, "Ferrite Bead", Manufacturer_Name="Murata Electronics", Mouser Part Number=81-BLM18KN101EH1D, Datasheet Link=https://www.murata.com/products/productdata/8809912041502/QNFA9160.pdf, Height=0.75mm, Manufacturer_Part_Number=BLM18KN101EH1D, Mouser Price/Stock=https://www.mouser.co.uk/ProductDetail/Murata-Electronics/BLM18KN101EH1D?qs=DRkmTr78QARL0%2F8fY2NzDQ%3D%3D
GPIO1 GPIO2 UART5: library part M20-9990345, "Connector", Manufacturer_Name=Harwin, Mouser Part Number=855-M20-9990345, Datasheet Link=https://cdn.harwin.com/pdfs/M20-999.pdf, Height=8.64mm, Manufacturer_Part_Number=M20-9990345, Mouser Price/Stock=https://www.mouser.co.uk/ProductDetail/Harwin/M20-9990345?qs=ulE8k0yEMYbl6ZPCtNdmpA%3D%3D
IC1: library part USBLC6-2SC6, "Integrated Circuit", Manufacturer_Name=STMicroelectronics, Mouser Part Number=511-USBLC6-2SC6, Arrow Part Number=USBLC6-2SC6, Arrow Price/Stock=https://www.arrow.com/en/products/usblc6-2sc6/stmicroelectronics?region=nac, Datasheet Link=http://www.st.com/st-web-ui/static/active/en/resource/technical/document/datasheet/CD00050750.pdf, Height=1.45mm, Manufacturer_Part_Number=USBLC6-2SC6, Mouser Price/Stock=https://www.mouser.co.uk/ProductDetail/STMicroelectronics/USBLC6-2SC6?qs=po45yt2pPpu%2FhNIlwQdTlg%3D%3D
IC23: library part CY7C65213-28PVXIT, "Integrated Circuit", Manufacturer_Name=Infineon, Mouser Part Number=727-CY7C6521328PVXIT, Arrow Part Number=CY7C65213-28PVXIT, Arrow Price/Stock=https://www.arrow.com/en/products/cy7c65213-28pvxit/infineon-technologies-ag?region=nac, Datasheet Link=https://componentsearchengine.com/Datasheets/2/CY7C65213-28PVXIT.pdf, Height=2mm, Manufacturer_Part_Number=CY7C65213-28PVXIT, Mouser Price/Stock=https://www.mouser.co.uk/ProductDetail/Infineon-Technologies/CY7C65213-28PVXIT?qs=cwEsOGdHuFTfRgwUJVDa5g%3D%3D
J1: library part 47346-0001, "Connector", Manufacturer_Name=Molex, Mouser Part Number=538-47346-0001, Datasheet Link=http://www.molex.com/pdm_docs/sd/473460001_sd.pdf, Manufacturer_Part_Number=47346-0001, Mouser Price/Stock=https://www.mouser.co.uk/ProductDetail/Molex/47346-0001?qs=c2CV6XM0DweJBWaSeyWeCw%3D%3D
J2: library part 90120-0764, "Connector", Manufacturer_Name=Molex, Mouser Part Number=538-90120-0764, Datasheet Link=https://www.molex.com/webdocs/datasheets/pdf/en-us/0901200764_PCB_HEADERS.pdf, Height=5.6mm, Manufacturer_Part_Number=90120-0764, Mouser Price/Stock=https://www.mouser.co.uk/ProductDetail/Molex/90120-0764?qs=QSnLD11VNirsMTdnHEPG3Q%3D%3D
J3: library part M20-9760542, "Connector", Manufacturer_Name=Harwin, Mouser Part Number=855-M20-9760542, Datasheet Link=https://cdn.harwin.com/pdfs/M20-976.pdf, Height=8.34mm, Manufacturer_Part_Number=M20-9760542, Mouser Price/Stock=https://www.mouser.co.uk/ProductDetail/Harwin/M20-9760542?qs=WS5Jv%252B%252Bx1qWXnFWOyfr5DQ%3D%3D
J4: "Connector", Manufacturer_Name=SAMTEC, Mouser Part Number=200-SSQ10602TDRA, Arrow Part Number=SSQ-106-02-T-D-RA, Arrow Price/Stock=https://www.arrow.com/en/products/ssq-106-02-t-d-ra/samtec?region=nac, Datasheet Link=http://suddendocs.samtec.com/catalog_english/ssq_th.pdf, Height=4.95mm, Manufacturer_Part_Number=SSQ-106-02-T-D-RA, Mouser Price/Stock=https://www.mouser.co.uk/ProductDetail/Samtec/SSQ-106-02-T-D-RA?qs=rU5fayqh%252BE1vYyxgAhwVTA%3D%3D
LED1 LED2 LED3 LED4 LED5 LED6 LED7: library part APT2012SECK_J3-PRV, "LED", Arrow Part Number=APT2012SECK/J3-PRV, Manufacturer_Name=Kingbright, Mouser Part Number=604-APT2012SECKJ3PRV, Arrow Price/Stock=https://www.arrow.com/en/products/apt2012seckj3-prv/kingbright?region=nac, Datasheet Link=https://www.mouser.de/datasheet/2/216/APT2012SECK-J3-PRV-1173389.pdf, Height=0.85mm, Manufacturer_Part_Number=APT2012SECK/J3-PRV, Mouser Price/Stock=https://www.mouser.co.uk/ProductDetail/Kingbright/APT2012SECK-J3-PRV?qs=D2TOvUWgdJ6T9J6WfI%252BQOg%3D%3D
MCU: "Integrated Circuit", Manufacturer_Name=STMicroelectronics, Mouser Part Number=511-STM32F103RET6, Arrow Part Number=STM32F103RET6, Arrow Price/Stock=https://www.arrow.com/en/products/stm32f103ret6/stmicroelectronics?region=nac, Datasheet Link=http://www.st.com/st-web-ui/static/active/en/resource/technical/document/datasheet/CD00191185.pdf, Height=1.6mm, Manufacturer_Part_Number=STM32F103RET6, Mouser Price/Stock=https://www.mouser.co.uk/ProductDetail/STMicroelectronics/STM32F103RET6?qs=tZXS5FmuAdnGL83bu1Xcew%3D%3D
Q1: "MOSFET (P-Channel)", Manufacturer_Name=Nexperia, Mouser Part Number=771-PMV48XPA2R, Arrow Part Number=PMV48XPA2R, Arrow Price/Stock=https://www.arrow.com/en/products/pmv48xpa2r/nexperia?region=nac, Datasheet Link=https://ms.componentsearchengine.com/Datasheets/2/PMV48XPA2R.pdf, Height=1.1mm, Manufacturer_Part_Number=PMV48XPA2R, Mouser Price/Stock=https://www.mouser.co.uk/ProductDetail/Nexperia/PMV48XPA2R?qs=GBLSl2Akirs2B9%2Ft67cLcA%3D%3D
R1 R2 R7 R8 R12 R13 R15 R16 R17 R18 R19 R20 R21 R22 R55 R56 R57 R58 R59 R60 R61: library part RK73B1JTTD103J, "Resistor", Manufacturer_Name="KOA Speer", Mouser Part Number=660-RK73B1JTTD103J, Arrow Part Number=RK73B1JTTD103J, Arrow Price/Stock=https://www.arrow.com/en/products/rk73b1jttd103j/koa-speer-electronics?region=asia, Datasheet Link=http://www.koaspeer.com/catimages/Products/RK73-RT/RK73-RT.pdf, Height=0.55mm, Manufacturer_Part_Number=RK73B1JTTD103J, Mouser Price/Stock=https://www.mouser.co.uk/ProductDetail/KOA-Speer/RK73B1JTTD103J?qs=hmtrJ2UjXcBKRTcwO9LloQ%3D%3D
R4 R6 R9 R10 R14 R23 R24 R25 R48: library part CMP-2000-00700-2, "RES SMD 0 OHM JUMPER 1/10W 0603", Manufacturer=Panasonic, Manufacturer Part Number=ERJ-3GEY0R00V, Package=0603, Power Rating=0.1W, Resistance=0Ω, Temperature="-55°C to +155°C", Temperature Coefficient=-100/+600ppm/°C, Temperature Range High=+155°C, Temperature Range Low=-55°C, Tolerance=5%, Voltage Rating=75V, Automotive=Yes, Automotive Grade="Grade 0", Category=Res, ComponentLink2Description=Datasheet, ComponentLink2URL=https://industrial.panasonic.com/cdbs/www-data/pdf/RDA0000/AOA0000C301.pdf, Composition="Thick Film", Device Class L1="Passive Components", Device Class L2=Resistors, Device Class L3="Chip SMD Resistors", Digikey Description="RES SMD 0 OHM JUMPER 1/10W 0603", Footprint Url=https://industrial.panasonic.com/cdbs/www-data/pdf/RDA0000/DMA0000COL17.pdf, Height=0.55mm, Ipc Land Pattern Name=RESC16080X45, Lead Free=Yes, Mouser Description="Resistor, Chip Thick Film, 0 Ohm, 0.1w, Resistor, Chip Thick Film, 0 Ohm, 0.1w, 5%", Octopart=https://octopart.com/erj-3gey0r00v-panasonic-55389238, RoHS=TRUE, Series=ERJ
SW1 SW2: library part CMP-2000-05160-2, "SWITCH TACTILE SPST-NO 0.05A 12V", Case/Package=SMD/SMT, Color=Black, Contact Resistance=100mR, Current Rating=50mA, Max Operating Temperature=60°C, Max Voltage Rating (DC)=12V, Min Operating Temperature=-20°C, Operating Force=160gf, Package Quantity=1, Actuator Length=0.85mm, Actuator Material=Nylon, Actuator Type=Standard, Contact Material=Silver, Contact Plating=Silver, Depth=9mm, Illumination Type=Non-Illuminated, Lead Free="Lead Free", Length=6mm, Max Current Rating=50mA, Mechanical Life=100000Cycles, Mount="Surface Mount", Orientation=Straight, Packaging="Tape and Reel", REACH SVHC="No SVHC", Switch Function=Off-Mom, Termination="Gull Wing", Throw Configuration=SPST, Voltage Rating (DC)=12V
TP1 TP2 TP3 TP4 TP6 TP17 TP18: library part CMP-1672-00008-1, "Test Point, 1 Position SMD, RoHS, Tape and Reel", Package Quantity=1000, ComponentLink1Description="Manufacturer URL", ComponentLink1URL=http://www.keyelco.com/, ComponentLink2Description=Datasheet, ComponentLink2URL=http://www.keyelco.com/product-pdf.cfm?p=1357, Contact Plating=Silver, DatasheetVersion=03/2014, Mount="Surface Mount", Mounting Technology="Surface Mount", PackageDescription="1-Pin Surface Mount Device, Body 3.81 x 2.03 mm", PackageReference=5019, Packaging="Tape and Reel", Pins=1, RoHSCompliant=True
U1: library part CMP-0244-00082-1, "Ultra Low Drop BICMOS Voltage Regulator, 3.3V, 3-Pin DPAK, Tape and Reel", ComponentLink1Description="Manufacturer URL", ComponentLink1URL=http://www.st.com, ComponentLink2Description=Datasheet, ComponentLink2URL=http://www.st.com/internet/com/TECHNICAL_RESOURCES/TECHNICAL_LITERATURE/DATASHEET/CD00150601.pdf, DatasheetVersion=1/01/2009, PackageDescription="3-Pin Transistor Outline Package 2.28 mm Pitch, 9.7 mm Lead Span (DPAK)", PackageReference=TO-252, PackageVersion=2011
Y1: library part ABLS-16.000MHZ-B2-T, "Crystal or Oscillator", Manufacturer_Name=ABRACON, Mouser Part Number=815-ABLS-16-B2, Arrow Part Number=ABLS-16.000MHZ-B2-T, Arrow Price/Stock=https://www.arrow.com/en/products/abls-16.000mhz-b2-t/abracon?region=nac, Datasheet Link=https://abracon.com/Resonators/ABLS.pdf, Manufacturer_Part_Number=ABLS-16.000MHZ-B2-T, Mouser Price/Stock=https://www.mouser.co.uk/ProductDetail/ABRACON/ABLS-16000MHZ-B2-T?qs=m%252BUhWDcpCfbvl4COQ0ty%2FA%3D%3D

## Free pads (board coordinates)
  round 60 hole 98.43: 2(6003.94,2165.35) 3(6003.94,3937.01) 5(3051.18,2165.35) q(3051.18,3937.01)

## Via types
v1: diameter 27.56, hole 11.81, L1(Signal) to L4(Signal), 175 vias

## Nets (pads, with @x,y where several pads share a name; then routed paths per layer and width w, separated by ;. In a path a pad name is that pad's centre, name@x,y a point inside that pad or via, vN(x,y) a via of type N, cw(c..) or ccw(c..) an arc to the next point about the centre after c; other vN are vias at no path point)
+3V3: "Boot pin.3" C5.2 C6.2 C7.2 C8.2 C9.2 C10.2 C11.1 C13.1 C14.2 C31.2 C35.2 D1.2 IC23.4 IC23.20 J2.1 J3.1 LED1.1 LED2.1 MCU.1 MCU.13 MCU.19 MCU.32 MCU.48 MCU.64 Q1.2 R1.1 R2.1 R8.2 R20.2 R57.2 TP2.1 U1.3 | length 1513.5
  L1(Signal) w10: 3532.77,2542.03 IC23.4 ; C35.2@3618.11,2940.94 3628.46,2930.59 3633.92,2930.59 3649.32,2915.19 3656.86,2907.65 3656.86,2871.23 IC23.20 ; C35.2 3628.46,2955.24 3628.46,2982.8 v1(3629.92,2984.25) ; 4307.97,2947.74 4308.16,2947.93 MCU.48 ; 4417.53,3354.33 4427.26,3344.61 MCU.32 ; MCU.19 4683.16,3360.33 ; MCU.64 4723.44,2868.76 4723.44,2835.62 ; MCU.1 4801.71,2947.03 4836.44,2947.03
  L1(Signal) w11: MCU.13 4851.98,3184.15 4876.22,3208.4 4917.06,3208.4 v1(4917.32,3208.66)
  L1(Signal) w12: 3532.77,2542.03 3539.37,2535.43 C14.2 v1(3539.37,2468.5) ; R8.2 3688.88,2362.11 3709.97,2362.11 3713.16,2365.3 v1(3717.37,2365.3) ; v1(4228.35,2937.01) 4229.35,2938.01 C5.2 ; v1(4255.91,2842.52) C11.1 4255.93,2929.05 C5.2 ; 4307.97,2947.74 4307.78,2947.74 4302.19,2942.15 4269.03,2942.15 C5.2 ; v1(4389.76,3435.04) C7.2 4398.72,3392.62 4398.72,3373.14 4417.53,3354.33 ; 4683.16,3360.33 4683.16,3402.78 4686.52,3406.14 4686.52,3441.44 v1(4687.09,3442.01) ; 4723.44,2835.62 4723.44,2823.52 4742.45,2804.51 C6.2 4744.09,2798.93 4743.27,2798.11 4743.27,2768.54 v1(4744.09,2767.72) ; 4836.44,2947.03 4866,2947.03 C10.2 4876.02,2937.01 4876.58,2937.57 4908.89,2937.57 v1(4909.45,2937.01) ; v1(5500,2531.5) D1.2
  L1(Signal) w15: v1(3236.22,2960.63) 3236.22,2962.6 3273.62,3000 LED2.1 ; LED1.1 3279.53,3101.38 v1(3279.53,3141.73) ; v1(4054.8,3001.97) R57.2 ; R2.1 4449.88,2667.7 4449.88,2625.22 v1(4450.93,2624.16) ; v1(4586.61,2622.05) R1.1 ; v1(5338.58,3937.01) TP2.1@5433.07,3937.01
  other v1: 4055.12,3494.09 4092.52,3535.43 4055.12,3572.83 3602.36,3712.6 3601.38,3747.05 3562.01,3768.7
+3V3_S: C12.2 C15.2 C16.2 J4.3 Q1.3 TP3.1 | length 2847
  L1(Signal) w30: Q1.3@3526.81,3816.69 3587.32,3877.2 4975.04,3877.2 TP3.1@5000,3902.17 ; TP3.1 TP3.1@5000,3902.17 ; 5625.98,2951.18 5466.79,2951.18 5449.21,2968.75 5449.21,3017.69 5449.21,3102.36 5449.21,3149.21 5114.17,3484.25 5114.17,3787.99 TP3.1@5000,3902.17
+5V: C30.2 C33.2 FB1.1 TP1.1 U1.1 | length 2211.6
  L1(Signal) w12: U1.1 3914.25,3343.39 v1(3929.13,3358.27) ; v1(5026.57,3797.24) 5026.57,3752.95 5027.56,3751.97 ; v1(5535.43,3933.07) 5606.3,3933.07 TP1.1
  L4(Signal) w12: v1(3929.13,3358.27) 3932.11,3361.24 4056.13,3361.24 4192.91,3498.03 4192.91,3625.98 4303.15,3736.22 4965.55,3736.22 v1(5026.57,3797.24) 5482.28,3797.24 5535.43,3850.39 v1(5535.43,3933.07)
BUTTON: C1.2 D1.3 MCU.37 SW1.3 SW1.4 | length 2134.2
  L1(Signal) w10: MCU.37 4400.69,3164.47 v1(4401.57,3165.35) ; SW1.4@5421.26,2365.16 SW1.4 SW1.3 5736.22,2365.16 C1.2 5728.35,2452.76 D1.3 5476.38,2452.76 5421.26,2507.87 v1(5421.26,2570.87)
  L4(Signal) w10: v1(4401.57,3165.35) 4404.93,3161.99 4416.75,3161.99 5007.87,2570.87 v1(5421.26,2570.87)
CONN_I2C1_SCL: J2.3 R2.2 R6.2 | length 768
  L1(Signal) w10: v1(4393.7,2385.83) 4466.65,2385.83 4480.72,2371.76 4548.92,2371.76 4582.68,2405.51 4582.68,2555.39 v1(4516.02,2622.05) R6.2 4511.1,2674.66 4466.73,2719.03 4461.54,2719.03 R2.2
  L4(Signal) w10: J2.3 4390.94,2219.29 4390.94,2383.07 v1(4393.7,2385.83)
CONN_I2C1_SDA: J2.2 R1.2 R4.2 | length 624.7
  L1(Signal) w10: R1.2 4599.33,2719.03 4607.03,2719.03 4651.4,2674.66 R4.2 4659.16,2671.82 4659.16,2627.73 v1@4656.32,2624.89 ; v1(4621.9,2377.81) 4659.16,2415.07 v1(4659.16,2624.89)
  L4(Signal) w10: J2.2 4620.68,2349.03 4620.68,2376.59 v1(4621.9,2377.81)
CONN_UART5_RX: R9.1 UART5.3 | length 536.7
  L1(Signal) w7: v1@4375.72,2633.86 R9.1
  L4(Signal) w10: UART5.3 4157.48,2403.81 v1(4375.7,2622.04)
CONN_UART5_TX: R10.1 UART5.2 | length 551
  L1(Signal) w7: v1@4310.29,2633.86 R10.1
  L4(Signal) w10: UART5.2 4057.48,2364.57 4310.29,2617.38 v1(4310.29,2622.05)
CONN_UART_GPIO2: GPIO1.1 R60.1 | length 1664.3
  L1(Signal) w10: R60.1 3961.64,2688.98 v1(4005.44,2688.98) ; v1(4606.3,3700.79) 4607.28,3701.77 4607.28,3770.67 v1(4608.27,3771.65)
  L4(Signal) w10: v1(4005.44,2688.98) 4005.44,2690.48 4201.69,2886.73 4201.69,3030.43 4358.27,3187.01 4358.27,3452.76 v1(4606.3,3700.79) ; v1(4608.27,3771.65) 4671.26,3771.65 4731.22,3831.61 4798.43,3898.82 GPIO1.1
CONN_UART_GPIO3: GPIO2.1 R61.1 | length 1673.8
  L1(Signal) w7: R61.1 3960.44,2606.3 v1(4003.94,2606.3)
  L1(Signal) w10: v1(4259.84,3631.55) v1@4259.84,3779.53
  L4(Signal) w10: v1(4003.94,2606.3) 3937.01,2673.23 3937.01,2834.65 4003.94,2901.57 4033.46,2901.57 4087.98,2956.09 4091.08,2959.19 4091.08,3146.2 4267.72,3322.83 4267.72,3618.92 4259.84,3626.79 v1(4259.84,3631.55) ; v1(4259.84,3771.65) 4290.35,3771.65 4440.53,3921.83 GPIO2.1
CONN_UART_GPIO4: GPIO1.2 R59.1 | length 1528.3
  L1(Signal) w10: R59.1 3962.84,2771.65 v1(4005.44,2771.65) ; v1(4560.04,3700.79) 4561.02,3701.77 4561.02,3770.67 v1(4562.01,3771.65)
  L4(Signal) w10: v1(4005.44,2771.65) 4027.56,2771.65 4169.29,2913.39 4169.29,3070.87 4303.46,3205.04 4303.46,3463.9 4424.01,3584.44 4443.69,3584.44 v1(4560.04,3700.79) ; v1(4562.01,3771.65) 4565.37,3775.01 4565.37,3785.84 4691.59,3912.06 4691.59,3935.09 GPIO1.2
CONN_UART_GPIO5: GPIO1.3 R58.1 | length 1430
  L1(Signal) w10: R58.1 v1(4005.44,2850.39) ; v1(4513.78,3700.79) 4514.76,3701.77 4514.76,3770.67 v1(4515.75,3771.65)
  L4(Signal) w10: v1(4005.44,2850.39) 4006.69,2851.65 4024.88,2851.65 4134.85,2961.62 4134.85,3101.72 4285.59,3252.46 4285.59,3535.5 4450.88,3700.79 v1(4513.78,3700.79) ; v1(4515.75,3771.65) 4516.26,3772.16 4516.26,3791.85 4591.39,3866.98 4591.39,3934.89 GPIO1.3
CONN_UART_GPIO6: GPIO2.3 R56.1 | length 1641.4
  L1(Signal) w10: v1(3271.65,2771.65) R56.1
  L4(Signal) w10: v1(3271.65,2771.65) 3245,2798.31 3245,2926.3 GPIO2.3
CONN_UART_GPIO7: GPIO2.2 R55.1 | length 1583.9
  L1(Signal) w10: v1(3271.65,2850.39) R55.1
  L4(Signal) w10: v1@3271.65,2848.43 v1(3271.65,2850.39) 3271.65,2851.67 4360.63,3940.65 GPIO2.2
CONN_USB_D_N: IC1.1 J1.2 | length 465.2
  L1(Signal) w8.96: J1.2 3117.44,3074.99 3181.28,3074.99 3204.72,3098.43 3204.72,3137.8 3251.76,3184.83 3370.41,3184.83 3427.57,3127.66 3435,3127.66 3445.67,3138.34 3449.36,3138.34 3462.6,3151.57 IC1.1
CONN_USB_D_P: IC1.3 J1.3 | length 471.2
  L1(Signal) w8.96: J1.3 3117.44,3058.03 3188.31,3058.03 3221.68,3091.4 3221.68,3130.77 3258.78,3167.87 3363.38,3167.87 3420.55,3110.7 3428.17,3110.7 3438.43,3100.44 3438.43,3097.24 3445.67,3090.01 3449.36,3090.01 3462.6,3076.77 IC1.3
GND: "Boot pin.1" C1.1 C2.1 C3.1 C4.1 C5.1 C6.1 C7.1 C8.1 C9.1 C10.1 C11.2 C12.1 C13.2 C14.1 C15.1 C16.1 C30.1 C31.1 C32.1 C33.1 C34.2 C35.1 D1.1 IC1.2 IC23.7 IC23.18 IC23.21 J1.5 J2.4 J3.3 J3.5 J4.1 LED3.2 LED4.2 LED5.2 LED6.2 LED7.2 MCU.12 MCU.18 MCU.31 MCU.47 MCU.63 pad.2 pad.3 pad.5 pad.q SW1.1 SW1.2 SW2.3 SW2.4 TP4.1 TP6.1 U1.4 UART5.1 | length 1132.5
  L1(Signal) w10: C14.1 C14.1@3604.84,2514.29 ; 3609.54,2538.67 IC23.7 ; 4307.97,2967.62 MCU.47 MCU.47@4348.1,2968.5 ; 4702.85,2836.52 MCU.63 ; MCU.12 4800.99,3164.28 4838.58,3164.28
  L1(Signal) w11: MCU.18 4703.25,3321.88 4703.25,3363.81 4741.08,3401.63 C8.1 4744.09,3408.59 4742.59,3410.1 4742.59,3439.44 v1(4744.09,3440.94)
  L1(Signal) w12: v1(3594.49,2468.5) C14.1 ; C14.1@3604.84,2514.29 3604.84,2533.98 3609.54,2538.67 ; C35.1 3682.58,2954.24 3682.58,2969.98 v1(3696.85,2984.25) 3711.71,2969.39 3711.71,2953.25 C34.2 3714.76,2939.56 3714.76,2870.23 IC23.18 ; v1(4141.73,2925.2) 4188.98,2877.95 C11.2 4196.85,2873.99 v1(4196.85,2842.52) ; v1(4228.35,2992.13) 4228.85,2992.63 4263.39,2992.63 4263.89,2992.13 C5.1 4268.83,2993.13 4294.34,2967.62 4307.97,2967.62 ; v1(4330.71,2381.89) TP6.1 ; v1(4688.98,2767.72) 4688.16,2768.54 4688.16,2798.11 4688.98,2798.93 C6.1 4687.34,2804.51 4702.85,2820.02 4702.85,2836.52 ; 4838.58,3164.28 4848.56,3154.3 4878.6,3154.3 C9.1 4916.79,3153.01 v1(4917.32,3153.54) ; C10.1 4908.33,2883.01 v1(4909.45,2884.14)
  L1(Signal) w15: v1(3603.39,3247) 3603.81,3247.42 3640.72,3247.42 C32.1@3641.34,3248.03 ; v1(3842.52,3712.6) 3846.93,3708.19 C31.1
  L1(Signal) w30: C32.1@3641.34,3248.03 C32.1
  other v1: 3787.4,2259.84 3866.14,2259.84 3787.4,2322.83 3866.14,2322.83 4665.35,2362.2 4921.26,2389.76 4719.49,2426.18 3862.2,2429.13 3933.07,2429.13 4555.12,2429.13 4618.11,2472.44 4877.95,2480.32 3862.2,2492.13 3933.07,2492.13 4732.28,2492.13 5363.19,2526.57 4818.9,2535.43 3862.2,2547.24 3933.07,2547.24 5365.16,2617.13 3893.7,2909.64 3453.74,2972.44 3858.27,3000 3503.94,3019.68 3917.32,3027.75 3917.32,3098.43 3814.96,3165.35 3415.35,3186.02 5285.43,3248.03 3521.65,3254.92 3416.34,3261.81 5226.38,3307.09 5157.48,3366.14 4232.8,3384.56 4330.71,3384.56 3852.36,3392.72 4153.54,3395.67 4645.67,3405.51 4232.28,3425.2 4330.71,3425.2 4842.52,3425.2 4960.63,3425.2 5068.9,3425.2 5472.44,3425.2 3996.06,3437.01 3913.39,3452.76 3827.76,3461.61 3757.87,3477.36 5374.02,3523.62 4240.16,3527.56 4318.9,3527.56 4055.12,3533.46 5324.8,3572.83 4812.99,3661.42 4901.57,3661.42 5068.9,3661.42 5157.48,3661.42 3641.73,3838.58 3769.68,3838.58 3887.8,3838.58 4005.91,3838.58 4114.17,3838.58 3641.73,3917.32 3769.68,3917.32 3887.8,3917.32 4005.91,3917.32 4114.17,3917.32
IC_UART4_RX: IC23.1 R23.2 | length 1077.4
  L1(Signal) w10: IC23.1 3456.34,2589.14 3456.34,2668.94 v1(3456.69,2669.29) ; v1(4246.51,2620.53) R23.2
  L4(Signal) w10: v1(3456.69,2669.29) 3665.35,2460.63 4086.61,2460.63 v1(4246.51,2620.53)
IC_UART4_TX: IC23.5 R24.2 | length 854.6
  L1(Signal) w10: IC23.5 3558.71,2589.14 3558.71,2668.94 v1(3559.06,2669.29) ; v1(4176.36,2622.86) R24.2
  L4(Signal) w10: v1(3559.06,2669.29) 3708.66,2519.68 4073.19,2519.68 v1(4176.36,2622.86)
IC_UART_GPIO2: IC23.13 R60.2 | length 196.2
  L1(Signal) w10: IC23.13 3766.94,2592.65 3766.94,2629.07 3825.32,2687.44 R60.2
IC_UART_GPIO3: IC23.14 R61.2 | length 122.5
  L1(Signal) w7: IC23.14 3788.67,2600.61 3794.03,2605.97 R61.2
IC_UART_GPIO4: IC23.12 R59.2 | length 276.8
  L1(Signal) w10: IC23.12 3737.49,2660.43 3832.28,2755.22 3884.4,2755.22 3891.97,2762.8 3891.97,2763.78 R59.2
IC_UART_GPIO5: IC23.8 R58.2 | length 443.6
  L1(Signal) w10: IC23.8 3635.13,2713.87 3665.35,2744.09 3771.65,2744.09 3870.25,2842.7 3889.41,2842.7 R58.2
IC_UART_GPIO6: IC23.27 R56.2 | length 191
  L1(Signal) w10: R56.2 3460.63,2771.65 3481.59,2792.61 IC23.27
IC_UART_GPIO7: IC23.28 R55.2 | length 96.7
  L1(Signal) w10: R55.2 3452.14,2850.39 3456,2854.25 IC23.28
IC_UART_NCTS: IC23.11 R25.2 | length 722.2
  L1(Signal) w10: v1(3710.28,2671.61) 3710.28,2590.41 IC23.11 ; v1(3960.63,2933.07) 3960.63,3010.45 4081.38,3131.2 R25.2
  L4(Signal) w10: v1(3710.28,2671.61) 3713.64,2674.97 3713.64,2686.08 v1(3960.63,2933.07)
IC_UART_NRTS: IC23.3 R14.2 | length 856.3
  L1(Signal) w10: IC23.3 3507.53,2589.14 3507.53,2668.94 v1(3507.87,2669.29) ; v1(4054.8,3066.93) 4106.1,3066.93 R14.2
  L4(Signal) w10: v1(3507.87,2669.29) 3508.38,2669.8 3508.38,2689.48 3539.37,2720.47 3885.83,3066.93 v1(4054.8,3066.93)
"MCU I2C1_SCL": MCU.58 R6.1 | length 177.4
  L1(Signal) w10: R6.1 4520.94,2731.75 4528.74,2739.54 4528.74,2744.46 4594.49,2810.21 4594.49,2826.27 4603.52,2835.3 4603.52,2868.76 MCU.58
"MCU I2C1_SDA": MCU.59 R4.1 | length 162.4
  L1(Signal) w10: MCU.59 4624.11,2819.28 4614.17,2809.35 4614.17,2768.97 4651.4,2731.75 R4.1
MCU_BOOT: MCU.60 R48.1 | length 330.5
  L1(Signal) w10: MCU.60 4644.7,2868.76 4644.7,2804.12 v1(4645.67,2803.15) ; v1@4724.41,2625.98 4726.48,2628.05 R48.1
  L4(Signal) w10: v1(4645.67,2803.15) 4645.67,2742.53 4724.41,2663.79 v1(4724.41,2622.05)
MCU_LED_3V3_A: LED7.1 R19.1 | length 87.8
  L1(Signal) w10: LED7.1 5283.46,3674.21 5298.23,3688.98 R19.1
MCU_LED_5V_A: LED6.1 R18.1 | length 86.1
  L1(Signal) w10: LED6.1 5011.81,3674.21 5026.57,3688.98 R18.1
MCU_LED_ERROR: R16.2 | length 230.5
  L1(Signal) w10: 4307.54,3223.96 4307.97,3223.52 4348.99,3223.52
  L1(Signal) w12: R16.2 4169.74,3332.23 4194.04,3332.23 4301.31,3224.96 4306.54,3224.96 4307.54,3223.96
MCU_LED_ERROR_A: LED4.1 R16.1 | length 762.4
  L1(Signal) w12: R16.1 4102.36,3397.64 4169.29,3464.57 4622.05,3464.57 4677.66,3520.18 LED4.1
MCU_LED_MEASURING: R17.2 | length 210.1
  L1(Signal) w10: 4307.97,3204.09 4348.74,3204.09 4348.99,3203.84
  L1(Signal) w12: R17.2 4170.42,3262.65 4194.04,3262.65 4232.28,3224.41 4259.84,3224.41 4280.17,3204.09 4307.97,3204.09
MCU_LED_MEASURING_A: LED5.1 R17.1 | length 659.7
  L1(Signal) w12: R17.1 4063.9,3267.72 4047.24,3284.38 4047.24,3385.83 4153.54,3492.13 4387.8,3492.13 4407.73,3512.06 LED5.1
MCU_LED_STATUS: R15.2 | length 189.5
  L1(Signal) w10: 4307.97,3183.97 4308.16,3184.15 4348.99,3184.15
  L1(Signal) w12: R15.2@4165.35,3197.83 4258.31,3197.83 4272.18,3183.97 4307.97,3183.97
MCU_LED_STATUS_A: LED3.1 R15.1 | length 483.7
  L1(Signal) w12: R15.1 4102.36,3199.8 4090.65,3211.52 4089.66,3211.52 4015.75,3285.43 4015.75,3395.67 4137.8,3517.72 LED3.1
MCU_NRST: C2.2 J3.10 MCU.7 R8.1 SW2.1 SW2.2 | length 2758.5
  L1(Signal) w10: SW2.2 SW2.1 3590.55,2187.01 3632.28,2228.74 C2.2 R8.1 3682.99,2293.23 4915.28,2293.23 4980.31,2358.27 4980.31,2545.08 J3.10 ; v1(4732.28,3066.93) 4732.73,3066.49 4800.36,3066.49 MCU.7
  L4(Signal) w10: v1(4732.28,3066.93) 4732.28,3000 5050.34,2681.94 5050.34,2632.53 J3.10
MCU_OSC_IN: C3.2 MCU.5 Y1.1 | length 583.7
  L1(Signal) w11.81: MCU.5 4965.68,3026.67 Y1.1@5074.9,2917.46 ; Y1.1 Y1.1@5074.9,2917.46 ; C3.2@5238.4,2994.59 5200.61,2956.8 5114.23,2956.8 Y1.1@5074.9,2917.46
MCU_OSC_OUT: C4.2 MCU.6 Y1.2 | length 582.9
  L1(Signal) w11.81: MCU.6 4967.57,3046.36 Y1.2@5074.9,3153.68 ; Y1.2 Y1.2@5074.9,3153.68 ; C4.2@5238.4,3076.56 5200.61,3114.34 5114.23,3114.34 Y1.2@5074.9,3153.68
MCU_SWCLK: J3.4 MCU.49 | length 1015.4
  L1(Signal) w10: v1(4374.02,2866.14) 4426.35,2866.14 4427.26,2867.05 MCU.49
  L4(Signal) w10: 4386.02,2858.89 4550.2,2694.71 4550.2,2584.65 4679.13,2455.71 4790.65,2455.71 4915.65,2330.71 5052.17,2330.71 J3.4
MCU_SWDIO: J3.2 MCU.46 | length 1296.8
  L1(Signal) w10: MCU.46 v1(4410.33,2987.3)
  L4(Signal) w10: v1(4410.33,2987.3) 4410.33,2982.55 4338.58,2910.8 4338.58,2847.44 4412.4,2773.62 4412.4,2625 4638.7,2398.7 4787.32,2398.7 4903.54,2282.48 5000.39,2282.48 J3.2
MCU_SWO: J3.6 MCU.55 | length 766.9
  L1(Signal) w10: v1(4545.26,2801.34) 4545.26,2805.11 4545.32,2805.16 4545.32,2869.61 MCU.55
  L4(Signal) w10: v1(4545.26,2801.34) 4548.62,2797.98 4548.62,2788.98 4691.93,2645.67 4691.93,2606.3 4874.41,2423.82 J3.6
MCU_UART4_RX: MCU.52 R23.1 TP17.1 | length 760.9
  L1(Signal) w10: MCU.52 4485.41,2868.76 4485.41,2829.71 4465.58,2809.88 4347.6,2809.88 4325.12,2787.4 4275.59,2787.4 4246.51,2758.32 R23.1 4251.43,2731.75 4279.22,2703.96 4279.22,2602.67 4305.5,2576.39 4367.6,2576.39 4393.88,2550.12 4453.23,2550.12 4488.19,2515.16 TP17.1
MCU_UART4_TX: MCU.51 R24.1 TP18.1 | length 644.4
  L1(Signal) w10: TP18.1 4208.19,2515.28 4208.19,2555.5 4208.66,2555.98 4208.66,2704.36 R24.1@4181.28,2731.75 ; R24.1 R24.1@4181.28,2731.75 ; MCU.51 4465.72,2868.76 4465.72,2835.3 4458.18,2827.76 4337.91,2827.76 4326.02,2815.87 4265.4,2815.87 R24.1@4181.28,2731.75
MCU_UART5_RX: MCU.54 R9.2 | length 256.3
  L1(Signal) w10: R9.2 4375.72,2765.48 4384.37,2774.13 4480.39,2774.13 4525.68,2819.43 MCU.54
MCU_UART5_TX: MCU.53 R10.2 | length 281.9
  L1(Signal) w10: R10.2 4315.21,2731.75 4323.01,2739.54 4323.01,2744.46 4370.56,2792.01 4472.99,2792.01 4506,2825.02 MCU.53
MCU_UART_NCTS: MCU.38 R25.1 | length 190.7
  L1(Signal) w10: R25.1 4247.64,3131.2 4261.22,3144.78 MCU.38
MCU_UART_NRTS: MCU.39 R14.1 | length 209.5
  L1(Signal) w10: R14.1 4219.74,3066.2 4278.64,3125.1 MCU.39
MISO_SEN: J4.4 MCU.22
MISO_SHREG: J4.10 MCU.35
MOSI_SEN: J4.6 MCU.23
MOSI_SHREG: J4.5 MCU.36
"NetBoot pin_2": "Boot pin.2" R7.2 | length 481.6
  L1(Signal) w10: v1(4763.78,2372.05) 4763.78,2606.3 v1(4779.53,2622.05) 4779.53,2668.39 R7.2
  L4(Signal) w10: v1(4763.78,2372.05) 4818.5,2317.32 4818.5,2216.54
NetC34_1: C34.1 IC23.17 | length 134.6
  L1(Signal) w10: IC23.17 3741.35,2871.23 3741.35,2907.65 3765.08,2931.38 3766.61,2931.38 C34.1@3775.98,2940.75 ; v1(3763.78,2984.25) 3767.14,2980.89 3767.14,2953.73 C34.1
NetQ1_1: Q1.1 R12.2 | length 200.6
  L1(Signal) w12: Q1.1 3486.22,3687.15 3493.25,3680.12 R12.2
NetR7_1: R7.1 R48.2 | length 57.6
  L1(Signal) w10: R48.2 R7.1
  L1(Signal) w12: R7.1@4776.94,2739.59 R7.1@4779.9,2742.54
NetR13_2: R13.2 R20.1 | length 66.8
  L1(Signal) w30: R13.2 R20.1
NetR18_2: R18.2
NetR19_2: R19.2 | length 50.4
  L1(Signal) w12: R19.2@5297.24,3753.94 R19.2 5299.7,3752.46 5345.96,3752.46 v1(5346.46,3752.95)
OE: J4.8 MCU.26
PL: J4.9 MCU.29
RX_LED: IC23.23 R21.2 | length 303.5
  L1(Signal) w10: R21.2 3409.45,2692.91 3536.09,2819.56 3572.55,2819.56 3580.09,2827.1 3580.09,2831.58 3580.09,2863.52 IC23.23
RX_LED_K: LED1.2 R21.1 | length 622.4
  L1(Signal) w10: R21.1 3251.97,2692.91 3224.41,2720.47 3224.41,2842.52 3282.85,2900.96 3353.72,2900.96 3421.26,2968.5 3421.26,3046.26 3388.7,3078.82 3388.7,3081.77 3372.05,3098.43 LED1.2
"S\ E\ N\ S\ O\ R\ S\ _\ E\ N\ A\ B\ L\ E\": R12.1 R13.1 | length 1243.5
  L1(Signal) w10: R12.1 3645.67,3618.11 v1(3594.49,3618.11) 3631.36,3581.24 3706.16,3581.24 3730.32,3557.09 3730.32,3457.04 3762.16,3425.2 3937.01,3425.2 3976.38,3385.83 3976.38,3346.46 v1(3927.17,3297.24) ; v1(4235.16,3336.61) 4235.16,3333.91 4325.86,3243.21 4348.99,3243.21
  L1(Signal) w15: R12.1 R13.1
  L4(Signal) w10: v1(3927.17,3297.24) 4195.79,3297.24 v1(4235.16,3336.61)
SCK_SEN: J4.2 MCU.21
SCK_SHREG: J4.11 MCU.34
SCLR: J4.7 MCU.27
TX_LED: IC23.22 R22.2 | length 378.4
  L1(Signal) w10: R22.2 3374.02,2615.16 3405.51,2646.65 3405.51,2657.48 3549.72,2801.69 3596.96,2801.69 3609.54,2814.26 IC23.22
TX_LED_K: LED2.2 R22.1 | length 564.4
  L1(Signal) w10: R22.1 3271.65,2614.17 3196.85,2688.98 3196.85,2854.33 3261.36,2918.84 3324.35,2918.84 3369.09,2963.58 LED2.2
UART_RESET#: IC23.19 MCU.40 R57.1 | length 842.3
  L1(Signal) w10: v1(3685.04,2812.42) 3686.31,2813.69 IC23.19 ; v1(4049.22,2958.65) 4053.97,2958.65 4065.72,2970.39 4134.76,2970.39 4165.35,3000.98 R57.1 4198.07,3001.97 4301.52,3105.41 MCU.40
  L4(Signal) w10: v1(3685.04,2812.42) 3749.42,2812.42 3895.66,2958.65 3948.52,2958.65 3949.59,2959.72 3971.67,2959.72 3972.74,2958.65 v1(4049.22,2958.65)
USB_D_N: IC1.6 IC23.16 | length 597.1
  L1(Signal) w8.96: IC1.6 3584.65,3151.57 3597.88,3138.34 3601.57,3138.34 3608.81,3131.1 3608.81,3127.9 3614.06,3122.65 3708.42,3122.65 3827.98,3003.09 3827.98,2836.78 3811.28,2820.08 3774.7,2820.08 3767.46,2827.32 3767.46,2863 IC23.16
USB_D_P: IC1.4 IC23.15 | length 500.6
  L1(Signal) w8.96: IC1.4 3584.65,3076.77 3597.88,3090.01 3601.57,3090.01 3608.81,3097.24 3608.81,3100.44 3614.06,3105.69 3701.39,3105.69 3811.02,2996.06 3811.02,2843.8 3805.72,2838.5 3793.05,2838.5 3788.67,2842.88 IC23.15
VBUS: C32.2 FB1.2 IC1.5 J1.1 | length 785.8
  L1(Signal) w20: J1.1 3156.07,3104.89 3169.29,3118.11 3169.29,3137.8 3251.97,3220.47 3476.38,3220.47 3504.92,3191.93 3515.75,3191.93 ; IC1.5 3571.02,3115.98 3547.71,3115.98 3515.91,3147.79 3515.91,3170.79 3515.75,3170.95 3515.75,3191.93 ; FB1.2 3705.12,3191.93 C32.2 3515.75,3191.93
pads on no net: IC23.2 IC23.6 IC23.9 IC23.10 IC23.24 IC23.25 IC23.26 J1.4 J1.6 J1.7 J1.8 J1.9 J1.10 J1.11 J3.7 J3.8 J3.9 J4.12 MCU.2 MCU.3 MCU.4 MCU.8 MCU.9 MCU.10 MCU.11 MCU.14 MCU.15 MCU.16 MCU.17 MCU.20 MCU.24 MCU.25 MCU.28 MCU.30 MCU.33 MCU.41 MCU.42 MCU.43 MCU.44 MCU.45 MCU.50 MCU.56 MCU.57 MCU.61 MCU.62
copper on no net: | length 14567.5
  L1(Signal) w10: v1(4441.04,3244.09) 4441.04,3246.36 4465.43,3270.75 4477.53,3270.75 4486.31,3279.53 4486.31,3321.48 ; v1(4476.45,3243.07) 4476.45,3244.39 4493.72,3261.65 4506,3273.94 4506,3321.48 ; v1(4511.9,3242.15) 4511.9,3246.36 4525.68,3260.13 4525.68,3321.48 ; 4545.37,3321.48 4545.37,3246.06 v1(4547.34,3244.09) ; 4565.05,3321.48 4565.05,3264.07 4582.77,3246.36 v1(4582.77,3244.09) ; 4604.42,3321.48 4604.42,3261.81 4621.01,3245.22 v1(4621.01,3242.96) ; 4624.11,3321.48 4624.11,3277.56 4657.57,3244.09 v1(4661.42,3244.09) ; 4643.79,3321.48 4644.7,3320.57 4644.7,3287.11 4661.06,3270.75 4674.13,3270.75 v1(4704.72,3240.16) ; v1@5503.94,3039.37 5614.17,3039.37 5625.98,3051.18 ; v1@5503.94,3145.11 v1(5507.87,3145.11) 5619.91,3145.11 5625.98,3151.18 ; v1@5503.94,3200.79 5693.7,3200.79 5744.09,3251.18 5763.78,3251.18 ; v1@5503.94,3251.97 5625.2,3251.97 5625.98,3251.18 ; v1(5507.87,2842.52) 5555.12,2795.28 5689.05,2795.28 5729.41,2835.64 5729.41,2836.5 5744.09,2851.18 5763.78,2851.18 ; v1(5507.87,2893.7) 5686.61,2893.7 5744.09,2951.18 5763.78,2951.18 ; v1(5507.87,2987.83) 5510.89,2984.81 5661.98,2984.81 5713.66,3036.5 5729.41,3036.5 5744.09,3051.18 5763.78,3051.18 ; v1(5508.44,3092.24) 5510.13,3090.55 5683.46,3090.55 5744.09,3151.18 5763.78,3151.18
  L4(Signal) w10: v1(4441.04,3244.09) 4421.26,3263.87 4421.26,3437.01 4616.14,3631.89 5226.38,3631.89 5507.87,3350.39 v1(5507.87,3251.97) ; v1(4476.45,3243.07) 4476.45,3247.82 4449.8,3274.47 4449.8,3430.12 4625.98,3606.3 5212.6,3606.3 5472.44,3346.46 5472.44,3233.97 v1(5507.87,3198.54) ; v1(4511.9,3242.15) 4511.9,3245.31 4485.24,3271.98 4485.24,3426.18 4641.73,3582.68 5196.85,3582.68 5442.91,3336.61 5442.91,3210.07 v1(5507.87,3145.11) ; v1(4547.34,3244.09) 4547.34,3247.94 4544.64,3247.94 4512.8,3279.78 4512.8,3419.29 4648.62,3555.12 5185.04,3555.12 5415.35,3324.8 5415.35,3184.2 5507.31,3092.24 v1(5508.44,3092.24) ; v1(4582.77,3244.09) 4582.77,3246.36 4544.29,3284.83 4544.29,3417.32 4656.5,3529.53 5171.26,3529.53 5388.78,3312.01 5388.78,3174.21 5505.96,3057.03 5505.96,3040.16 v1(5507.87,3038.25) ; v1(4621.01,3242.96) 4621.01,3243.55 4573.82,3290.74 4573.82,3412.4 4664.37,3502.95 5158.46,3502.95 5362.2,3299.21 5362.2,3133.5 v1(5507.87,2987.83) ; v1(4661.42,3244.09) 4606.3,3299.21 4606.3,3407.48 4677.17,3478.35 5143.7,3478.35 5339.57,3282.48 5339.57,3062.01 v1(5507.87,2893.7) ; v1(4704.72,3240.16) 4665.35,3279.53 4665.35,3307.09 4812.99,3454.72 5127.95,3454.72 5312.99,3269.69 5312.99,3037.4 v1(5507.87,2842.52)
  other v1: 4896.65,2616.14 4829.72,2690.94 4944.88,2699.8 4875.98,2767.72 4937.99,2840.55 4548.23,2970.47 4606.3,3030.51 4458.66,3058.07 4521.65,3119.09